# EAGLE board CT_schematic (EAGLE 7.6.0)

Size 100 x 80 mm. Coordinates in mm from the lower left corner, seen from the top.
Outline: 0,0 100,0 100,80 0,80 0,0
Copper layers (1*16): Top 0.035mm / dielectric 1.5mm / Bottom 0.035mm
Design rules "default": minimum track width 10mil, minimum drill 24mil, track to track 8mil, track to pad 8mil, pad to pad 8mil, via to via 8mil, smd to smd 8mil, copper to edge 40mil, drill to drill 8mil, minimum pad ring 10mil, minimum via ring 8mil, stop-mask expansion 4mil, vias tented up to drill 0mil, thermal gap 10mil

## Footprints (pad centres in the part's own frame; a part is rotated, then mirrored left to right if it is on the bottom)
C0603 = smd 0.8 x 0.8: 1 -0.762,0; 2 0.762,0
C0402 = smd 0.5 x 0.5: 1 -0.508,0; 2 0.508,0
C0805 = smd 1.2 x 1.3: 1 -1.016,0; 2 1.016,0
C1206 = smd 1.3 x 1.6: 1 -1.524,0; 2 1.524,0
C1210 = smd 1.2 x 2.5: 1 -1.524,0; 2 1.524,0
EXV-9H = smd 3.505 x 1.676: 1 -2.857,0; 2 2.857,0
PJ-037B_PACKAGE = drill 3.7 square: 1 12,0 | drill 3.2 square: 2 6,0
R0603 = smd 0.8 x 0.8: 1 -0.762,0; 2 0.762,0
LQFP100 = smd 0.3 x 1.2: 1 -6,-7.75; 2 -5.5,-7.75; 3 -5,-7.75; 4 -4.5,-7.75; 5 -4,-7.75; 6 -3.5,-7.75; 7 -3,-7.75; 8 -2.5,-7.75; 9 -2,-7.75; 10 -1.5,-7.75; 11 -1,-7.75; 12 -0.5,-7.75; 13 0,-7.75; 14 0.5,-7.75; 15 1,-7.75; 16 1.5,-7.75; 17 2,-7.75; 18 2.5,-7.75; 19 3,-7.75; 20 3.5,-7.75; 21 4,-7.75; 22 4.5,-7.75; 23 5,-7.75; 24 5.5,-7.75; 25 6,-7.75; 51 6,7.75; 52 5.5,7.75; 53 5,7.75; 54 4.5,7.75; 55 4,7.75; 56 3.5,7.75; 57 3,7.75; 58 2.5,7.75; 59 2,7.75; 60 1.5,7.75; 61 1,7.75; 62 0.5,7.75; 63 0,7.75; 64 -0.5,7.75; 65 -1,7.75; 66 -1.5,7.75; 67 -2,7.75; 68 -2.5,7.75; 69 -3,7.75; 70 -3.5,7.75; 71 -4,7.75; 72 -4.5,7.75; 73 -5,7.75; 74 -5.5,7.75; 75 -6,7.75 | smd 1.2 x 0.3: 26 7.75,-6; 27 7.75,-5.5; 28 7.75,-5; 29 7.75,-4.5; 30 7.75,-4; 31 7.75,-3.5; 32 7.75,-3; 33 7.75,-2.5; 34 7.75,-2; 35 7.75,-1.5; 36 7.75,-1; 37 7.75,-0.5; 38 7.75,0; 39 7.75,0.5; 40 7.75,1; 41 7.75,1.5; 42 7.75,2; 43 7.75,2.5; 44 7.75,3; 45 7.75,3.5; 46 7.75,4; 47 7.75,4.5; 48 7.75,5; 49 7.75,5.5; 50 7.75,6; 76 -7.75,6; 77 -7.75,5.5; 78 -7.75,5; 79 -7.75,4.5; 80 -7.75,4; 81 -7.75,3.5; 82 -7.75,3; 83 -7.75,2.5; 84 -7.75,2; 85 -7.75,1.5; 86 -7.75,1; 87 -7.75,0.5; 88 -7.75,0; 89 -7.75,-0.5; 90 -7.75,-1; 91 -7.75,-1.5; 92 -7.75,-2; 93 -7.75,-2.5; 94 -7.75,-3; 95 -7.75,-3.5; 96 -7.75,-4; 97 -7.75,-4.5; 98 -7.75,-5; 99 -7.75,-5.5; 100 -7.75,-6
TDFN-8/6MM = smd 0.3 x 0.75: 1 0,0; 2 0.5,0; 3 1,0; 4 1.5,0; 5 1.5,3; 6 1,3; 7 0.5,3; 8 0,3
SOIC-8 = smd 1.6 x 0.6: 1 -2.7,1.905 | smd 1.55 x 0.6: 2 -2.7,0.635; 3 -2.7,-0.635; 4 -2.7,-1.905; 5 2.7,-1.905; 6 2.7,-0.635; 7 2.7,0.635; 8 2.7,1.905
182-009-MALE = drill 1.194 pad 1.524 octagon: 1 -5.537,10.923; 2 -2.769,10.923; 3 0,10.923; 4 2.769,10.923; 5 5.537,10.923; 6 -4.153,8.08; 7 -1.384,8.08; 8 1.384,8.08; 9 4.153,8.08 | hole 3.048: -12.446,9.501; 12.446,9.501
ATBTLC1000-MR110CA = smd 2 x 0.5: 1 -7.2,2.7; 2 -7.2,1.8; 3 -7.2,0.9; 4 -7.2,0; 5 -7.2,-0.9; 6 -7.2,-1.8; 7 -7.2,-2.7; 8 -7.2,-3.6; 17 3.6,-3.6; 18 3.6,-2.7; 19 3.6,-1.8; 20 3.6,-0.9; 21 3.6,0; 22 3.6,0.9; 23 3.6,1.8; 24 3.6,2.7 | smd 0.5 x 2: 9 -4.255,-6.824; 10 -3.355,-6.824; 11 -2.455,-6.824; 12 -1.555,-6.824; 13 -0.655,-6.824; 14 0.245,-6.824; 15 1.145,-6.824; 16 2.045,-6.824 | smd 2.7 x 2.7: 25 -1.261,-0.328
QFN-32 = smd 0.6 x 0.3: 1 -2.3,1.75; 2 -2.3,1.25; 3 -2.3,0.75; 4 -2.3,0.25; 5 -2.3,-0.25; 6 -2.3,-0.75; 7 -2.3,-1.25; 8 -2.3,-1.75; 17 2.3,-1.75; 18 2.3,-1.25; 19 2.3,-0.75; 20 2.3,-0.25; 21 2.3,0.25; 22 2.3,0.75; 23 2.3,1.25; 24 2.3,1.75 | smd 0.3 x 0.6: 9 -1.75,-2.3; 10 -1.25,-2.3; 11 -0.75,-2.3; 12 -0.25,-2.3; 13 0.25,-2.3; 14 0.75,-2.3; 15 1.25,-2.3; 16 1.75,-2.3; 25 1.75,2.3; 26 1.25,2.3; 27 0.75,2.3; 28 0.25,2.3; 29 -0.25,2.3; 30 -0.75,2.3; 31 -1.25,2.3; 32 -1.75,2.3 | smd 3.2 x 3.2: EXP 0,0
SJ-43515TS-SMT-TR = smd 2.2 x 3: 1 0.6,-7.4; 4 3.4,-7.4 | smd 3 x 3: 2 12.8,-7.4; 5 17,-3 | smd 2 x 3: 3 5.3,0; 6 2.5,0 | drill 1.8: P$7 4.5,-3.69; P$8 11.54,-3.69
WM-64PC = drill 0.6 pad 1: 1 -1,0.95; 2 -1,-0.95
WFDN-8 = smd 0.48 x 0.7: 1 0,0; 2 1.27,0; 3 2.54,0; 4 3.81,0; 5 3.81,4.45; 6 2.54,4.45; 7 1.27,4.45; 8 0,4.45 | smd 4 x 3: 9 1.89,2.25
ABS07-32.768KHZ-7-T = smd 1.1 x 2.4: 1 -2.5,0; 2 0,0
ABLS-25.000MHZ-B2F-T = smd 5.6 x 2.8: 1 -3.81,0; 2 5.69,0
ASFL1 = smd 1.7 x 1.5: 1 -1.27,-1.1; 2 1.27,-1.1; 3 1.27,1.1; 4 -1.27,1.1
WSON-8 = smd 0.3 x 0.6: 1 -0.75,0; 2 0.05,0; 3 0.85,0; 4 1.65,0; 5 1.65,3.8; 6 0.85,3.8; 7 0.05,3.8; 8 -0.75,3.8 | smd 3 x 2.6: PAD 0.45,1.9
SON-6 = smd 0.55 x 0.3: 1 -0.355,0.5 | smd 0.52 x 0.3: 2 -0.37,0; 3 -0.37,-0.5; 4 0.37,-0.5; 5 0.37,0; 6 0.37,0.5
SW_4-1437565-2 = smd 1.4 x 2.1: 1 -2.23,4.55; 2 -2.23,-4.55; 3 2.23,4.55; 4 2.23,-4.55
LGM67K-G1J2-24-Z = smd 0.8 x 1.4: A -2,0; C 0,0
NC7SZ125M5X = smd 1.3 x 0.7: 1 -1.3,0.95; 2 -1.3,0; 3 -1.3,-0.95; 4 1.3,-0.95; 5 1.3,0.95

## Placement (x,y rotation side)
C1  1e-06  [C0603]  -68.58,87.63 0 top  (outside the outline)
C2  1e-07  [C0603]  -72.39,87.63 0 top  (outside the outline)
C3  1e-07  [C0603]  -76.2,87.63 0 top  (outside the outline)
C4  1e-07  [C0603]  -80.01,87.63 0 top  (outside the outline)
C5  1e-07  [C0603]  -83.82,87.63 0 top  (outside the outline)
C6  1e-07  [C0603]  -87.63,87.63 0 top  (outside the outline)
C7  1e-07  [C0603]  -91.44,87.63 0 top  (outside the outline)
C8  4.7e-06  [C0603]  -64.77,87.63 0 top  (outside the outline)
C9  1e-07  [C0603]  -15.24,92.71 0 top  (outside the outline)
C10  1e-08  [C0603]  -19.05,92.71 0 top  (outside the outline)
C11  1e-06  [C0603]  -22.86,92.71 0 top  (outside the outline)
C12  1e-11  [C0402]  -34.29,97.79 0 top  (outside the outline)
C13  1e-11  [C0402]  -38.1,97.79 0 top  (outside the outline)
C14  1e-11  [C0402]  -41.91,97.79 0 top  (outside the outline)
C15  1e-11  [C0402]  -45.72,97.79 0 top  (outside the outline)
C16  1e-08  [C0402]  -49.53,97.79 0 top  (outside the outline)
C17  1e-06  [C0603]  -26.67,92.71 0 top  (outside the outline)
C18  1e-06  [C0603]  -30.48,92.71 0 top  (outside the outline)
C19  1e-05  [C0805]  -40.64,81.28 0 top  (outside the outline)
C20  1e-05  [C0805]  -45.72,81.28 0 top  (outside the outline)
C21  1e-06  [C0603]  -34.29,92.71 0 top  (outside the outline)
C22  1e-06  [C0603]  -38.1,92.71 0 top  (outside the outline)
C23  1e-06  [C0603]  -41.91,92.71 0 top  (outside the outline)
C24  1e-06  [C0603]  -45.72,92.71 0 top  (outside the outline)
C25  1e-06  [C0603]  -49.53,92.71 0 top  (outside the outline)
C26  1e-06  [C0603]  -53.34,92.71 0 top  (outside the outline)
C27  1e-06  [C0603]  -57.15,92.71 0 top  (outside the outline)
C28  1e-07  [C0402]  -53.34,97.79 0 top  (outside the outline)
C29  1e-07  [C0402]  -57.15,97.79 0 top  (outside the outline)
C30  1e-07  [C0402]  -60.96,97.79 0 top  (outside the outline)
C31  1e-07  [C0402]  -64.77,97.79 0 top  (outside the outline)
C32  1e-06  [C0603]  -60.96,92.71 0 top  (outside the outline)
C33  1e-07  [C0402]  -68.58,97.79 0 top  (outside the outline)
C34  1e-08  [C0402]  -72.39,97.79 0 top  (outside the outline)
C35  1e-08  [C0402]  -76.2,97.79 0 top  (outside the outline)
C36  1e-05  [C1206]  -22.86,81.28 0 top  (outside the outline)
C37  1e-05  [C0805]  -50.8,81.28 0 top  (outside the outline)
C38  1e-08  [C0402]  -80.01,97.79 0 top  (outside the outline)
C39  1e-05  [C1206]  -29.21,81.28 0 top  (outside the outline)
C40  1e-05  [C1210]  -91.44,73.66 0 top  (outside the outline)
C41  1e-06  [C0603]  -64.77,92.71 0 top  (outside the outline)
C42  1e-05  [C1210]  -16.51,82.55 0 top  (outside the outline)
C43  1e-07  [C0402]  -83.82,97.79 0 top  (outside the outline)
C44  0.0001  [EXV-9H]  -17.78,74.93 0 top  (outside the outline)
C45  0.0001  [EXV-9H]  -29.21,74.93 0 top  (outside the outline)
C46  1e-08  [C0402]  -87.63,97.79 0 top  (outside the outline)
J1  PJ-037B  [PJ-037B_PACKAGE]  -55.88,43.18 0 top  (outside the outline)
R2  1000.0  [R0603]  -68.58,92.71 0 top  (outside the outline)
R4  4700.0  [R0603]  -72.39,92.71 0 top  (outside the outline)
R5  2200.0  [R0603]  -76.2,92.71 0 top  (outside the outline)
R6  2200.0  [R0603]  -80.01,92.71 0 top  (outside the outline)
R7  10000.0  [R0603]  -25.4,87.63 0 top  (outside the outline)
R8  10000.0  [R0603]  -30.48,87.63 0 top  (outside the outline)
R9  10000.0  [R0603]  -35.56,87.63 0 top  (outside the outline)
R10  10000.0  [R0603]  -40.64,87.63 0 top  (outside the outline)
R11  120.0  [R0603]  -83.82,92.71 0 top  (outside the outline)
R12  10000.0  [R0603]  -45.72,87.63 0 top  (outside the outline)
R13  10000.0  [R0603]  -50.8,87.63 0 top  (outside the outline)
R14  1270.0  [R0603]  -87.63,92.71 0 top  (outside the outline)
R15  1270.0  [R0603]  -91.44,92.71 0 top  (outside the outline)
R16  100000.0  [R0603]  -55.88,81.28 0 top  (outside the outline)
R17  100000.0  [R0603]  -60.96,81.28 0 top  (outside the outline)
R18  100000.0  [R0603]  -66.04,81.28 0 top  (outside the outline)
R19  100000.0  [R0603]  -71.12,81.28 0 top  (outside the outline)
R20  200.0  [R0603]  -15.24,97.79 0 top  (outside the outline)
R21  1000.0  [R0603]  -19.05,97.79 0 top  (outside the outline)
R22  100000.0  [R0603]  -76.2,81.28 0 top  (outside the outline)
R23  2231.0  [R0603]  -22.86,97.79 0 top  (outside the outline)
R24  1000.0  [R0603]  -26.67,97.79 0 top  (outside the outline)
R25  100000.0  [R0603]  -81.28,81.28 0 top  (outside the outline)
R26  300000.0  [R0603]  -86.36,81.28 0 top  (outside the outline)
R27  100000.0  [R0603]  -91.44,81.28 0 top  (outside the outline)
R28  10000.0  [R0603]  -55.88,87.63 0 top  (outside the outline)
R29  10000.0  [R0603]  -60.96,87.63 0 top  (outside the outline)
R30  9100.0  [R0603]  -30.48,97.79 0 top  (outside the outline)
R31  680000.0  [R0603]  -15.24,87.63 0 top  (outside the outline)
R32  120000.0  [R0603]  -20.32,87.63 0 top  (outside the outline)
U1  STM32L443VCT6  [LQFP100]  -85.09,8.89 0 top  (outside the outline)
U2  24AA64T-I/MNY  [TDFN-8/6MM]  -71.12,54.61 0 top  (outside the outline)
U3  MCP2562-E/SN  [SOIC-8]  -83.82,55.88 0 top  (outside the outline)
U4  182-009-113R531  [182-009-MALE]  -36.83,6.35 0 top  (outside the outline)
U5  ATBTLC1000-MR110CA  [ATBTLC1000-MR110CA]  -57.15,8.89 0 top  (outside the outline)
U6  SGTL5000XNAA3  [QFN-32]  -54.61,55.88 0 top  (outside the outline)
U7  SJ-43515TS-SMT-TR  [SJ-43515TS-SMT-TR]  -39.37,31.75 0 top  (outside the outline)
U8  SJ-43515TS-SMT-TR  [SJ-43515TS-SMT-TR]  -67.31,31.75 0 top  (outside the outline)
U9  SJ-43515TS-SMT-TR  [SJ-43515TS-SMT-TR]  -39.37,45.72 0 top  (outside the outline)
U10  WM-64PCT  [WM-64PC]  -40.64,55.88 0 top  (outside the outline)
U11  SST26VF064B-104I/MF  [WFDN-8]  -31.75,53.34 0 top  (outside the outline)
U12  ABS07-32.768KHZ-7-T  [ABS07-32.768KHZ-7-T]  -71.12,74.93 0 top  (outside the outline)
U13  ABLS-25.000MHZ-B2F-T  [ABLS-25.000MHZ-B2F-T]  -48.26,74.93 0 top  (outside the outline)
U14  ASFL-24.57MHZ-NCS  [ASFL1]  -86.36,66.04 0 top  (outside the outline)
U15  LP3878SDX-ADJ/NOPB  [WSON-8]  -30.48,63.5 0 top  (outside the outline)
U16  LP3878SDX-ADJ/NOPB  [WSON-8]  -50.8,63.5 0 top  (outside the outline)
U17  LP2951ACSDX/NOPB  [WSON-8]  -68.58,63.5 0 top  (outside the outline)
U18  TPS3895ADRYR  [SON-6]  -90.17,96.52 0 top  (outside the outline)
U19  4-1437565-2  [SW_4-1437565-2]  -72.39,43.18 0 top  (outside the outline)
U20  Q65110A2395  [LGM67K-G1J2-24-Z]  -80.01,73.66 0 top  (outside the outline)
U21  nc7sz125m5x  [NC7SZ125M5X]  -34.29,81.28 0 top  (outside the outline)

## Library data of the parts
C1-C46 J1 R2 R4-R32 U1-U21 = circuit_tree

## Nets
CLK_CRYSTAL_U1_8: C12.1 U1.8 U12.1
CLK_CRYSTAL_U1_9: C13.1 U1.9 U12.2
CLK_CRYSTAL_U1_12: C14.1 U1.12 U13.1
CLK_CRYSTAL_U1_13: C15.1 U1.13 U13.2
CLK_U6_21: U6.21 U14.3
GND: C1.2 C2.2 C3.2 C4.2 C5.2 C6.2 C7.2 C8.2 C9.2 C10.2 C11.2 C12.2 C13.2 C14.2 C15.2 C16.2 C17.2 C18.2 C19.2 C20.2 C28.2 C29.2 C30.2 C31.2 C32.2 C33.2 C34.2 C35.2 C36.2 C37.2 C38.2 C39.2 C40.2 C41.2 C42.2 C43.2 C44.2 C45.2 C46.2 J1.2 R2.2 R7.2 R8.2 R10.2 R15.2 R21.2 R24.2 R27.2 R30.2 R32.2 U1.10 U1.19 U1.20 U1.27 U1.49 U1.74 U1.99 U2.4 U2.7 U3.2 U3.8 U4.5 U5.1 U5.9 U5.13 U5.24 U5.25 U6.1 U6.3 U6.7 U6.EXP U8.1 U9.1 U10.2 U11.4 U11.9 U14.2 U15.3 U15.PAD U16.3 U16.PAD U17.3 U17.4 U17.PAD U18.2 U20.C U21.1 U21.3
NET_U1_14: R4.1 U1.14 U21.4
NET_U1_68: R5.1 U1.68 U2.6
NET_U1_69: R6.1 U1.69 U2.5
NET_U1_94: R7.1 U1.94
NET_U1_97: U20.A
NET_U1_98: U19.3 U19.4
NET_U2_1: R8.1 U2.1
NET_U2_2: R9.1 U2.2
NET_U2_3: R10.1 U2.3
NET_U3_6: R11.2 U3.6
NET_U4_2: R11.2 U3.6 U4.2
NET_U4_3: R11.1 U3.7 U4.3
NET_U5_17: R12.1 U5.17
NET_U5_20: R13.1 U5.20
NET_U6_10: C31.1 U6.10
NET_U6_29: R14.1 U6.29
NET_U6_31: R15.1 U6.31
NET_U7_1: U6.4 U7.1
NET_U7_2: U6.2 U7.2
NET_U7_5: U6.6 U7.5
NET_U8_2: C22.1 U8.2
NET_U8_5: C21.1 U8.5
NET_U8_11: C22.2
NET_U8_12: C21.2
NET_U9_2: C24.1 C25.1 U9.2
NET_U9_5: C23.1 U9.5
NET_U9_13: C24.2 C25.2
NET_U9_14: C23.2
NET_U10_1: C26.1 C27.1 C32.1 U6.16 U10.1
NET_U10_15: C26.2 C27.2
NET_U15_1: C35.1 U15.1
NET_U15_6: R20.2 R21.1 U15.6
NET_U15_8: R19.1 U15.8
NET_U16_1: C38.1 U16.1
NET_U16_6: R23.2 R24.1 U16.6
NET_U16_8: R22.1 U16.8
NET_U17_5: R25.1 U17.5
NET_U17_7: R26.2 R27.1 U17.7
NET_U18_1: R29.1 R30.1 U18.1
NET_U18_3: R31.2 R32.1 U18.3
NET_U18_4: R28.1 U18.4 U21.2
NET_U19_1: R2.1 U19.1 U19.2
PROC_CAN1_RX: U1.70 U3.4
PROC_CAN1_TX: U1.71 U3.1
PROC_QUADSPI_BK1_IO0: U1.36 U11.5
PROC_QUADSPI_BK1_IO1: U1.35 U11.2
PROC_QUADSPI_BK1_IO2: R17.1 U1.32 U11.3
PROC_QUADSPI_BK1_IO3: R18.1 U1.31 U11.7
PROC_QUADSPI_BK1_NCS: R16.1 U1.25 U11.1
PROC_QUADSPI_CLK: U1.26 U11.6
PROC_SAI1_FS_A: U1.3 U6.23
PROC_SAI1_SCK_A: U1.4 U6.24
PROC_SAI1_SD_A: U1.5 U6.26
PROC_SPI1_MISO: U5.14
PROC_SPI1_MOSI: U5.11
PROC_SPI1_NSS: U5.12
PROC_SPI1_SCK: U5.10
VCC_S1_10V1: C36.1 C39.1 C41.1 C44.1 C45.1 J1.1 R19.2 R22.2 U15.4 U16.4 U17.8
VCC_TIER1_1V2: C28.1 C37.1 R20.1 U6.30 U15.5
VCC_TIER1_3V3: C1.1 C2.1 C3.1 C4.1 C5.1 C6.1 C7.1 C8.1 C9.1 C10.1 C11.1 C16.1 C18.1 C19.1 C20.1 C29.1 C30.1 C33.1 C34.1 C40.1 C43.1 C46.1 R4.2 R5.2 R6.2 R9.2 R12.2 R13.2 R14.2 R16.2 R17.2 R18.2 R23.1 R28.2 R29.2 R31.1 U1.6 U1.11 U1.21 U1.22 U1.28 U1.50 U1.73 U1.75 U1.100 U2.8 U3.5 U5.6 U5.22 U6.5 U6.20 U11.8 U14.4 U16.5 U18.6 U21.5
VCC_TIER1_5V0: C17.1 C42.1 R25.2 R26.1 U3.3 U17.1

## Tracks (layer width: path | path; a pad name or v marks a point on that pad's centre or on a via)
CLK_CRYSTAL_U1_8  (2 unrouted)
CLK_CRYSTAL_U1_9  (2 unrouted)
CLK_CRYSTAL_U1_12  (2 unrouted)
CLK_CRYSTAL_U1_13  (2 unrouted)
CLK_U6_21  (1 unrouted)
GND  (87 unrouted)
NET_U1_14  (2 unrouted)
NET_U1_68  (2 unrouted)
NET_U1_69  (2 unrouted)
NET_U1_94  (1 unrouted)
NET_U1_98  (1 unrouted)
NET_U2_1  (1 unrouted)
NET_U2_2  (1 unrouted)
NET_U2_3  (1 unrouted)
NET_U3_6  (1 unrouted)
NET_U4_2  (2 unrouted)
NET_U4_3  (2 unrouted)
NET_U5_17  (1 unrouted)
NET_U5_20  (1 unrouted)
NET_U6_10  (1 unrouted)
NET_U6_29  (1 unrouted)
NET_U6_31  (1 unrouted)
NET_U7_1  (1 unrouted)
NET_U7_2  (1 unrouted)
NET_U7_5  (1 unrouted)
NET_U8_2  (1 unrouted)
NET_U8_5  (1 unrouted)
NET_U9_2  (2 unrouted)
NET_U9_5  (1 unrouted)
NET_U9_13  (1 unrouted)
NET_U10_1  (4 unrouted)
NET_U10_15  (1 unrouted)
NET_U15_1  (1 unrouted)
NET_U15_6  (2 unrouted)
NET_U15_8  (1 unrouted)
NET_U16_1  (1 unrouted)
NET_U16_6  (2 unrouted)
NET_U16_8  (1 unrouted)
NET_U17_5  (1 unrouted)
NET_U17_7  (2 unrouted)
NET_U18_1  (2 unrouted)
NET_U18_3  (2 unrouted)
NET_U18_4  (2 unrouted)
NET_U19_1  (2 unrouted)
PROC_CAN1_RX  (1 unrouted)
PROC_CAN1_TX  (1 unrouted)
PROC_QUADSPI_BK1_IO0  (1 unrouted)
PROC_QUADSPI_BK1_IO1  (1 unrouted)
PROC_QUADSPI_BK1_IO2  (2 unrouted)
PROC_QUADSPI_BK1_IO3  (2 unrouted)
PROC_QUADSPI_BK1_NCS  (2 unrouted)
PROC_QUADSPI_CLK  (1 unrouted)
PROC_SAI1_FS_A  (1 unrouted)
PROC_SAI1_SCK_A  (1 unrouted)
PROC_SAI1_SD_A  (1 unrouted)
VCC_S1_10V1  (10 unrouted)
VCC_TIER1_1V2  (4 unrouted)
VCC_TIER1_3V3  (55 unrouted)
VCC_TIER1_5V0  (5 unrouted)